# Altium PCB robotcar.PcbDoc (part 2 of 3)
Units mil, origin at the board's own origin, x right, y up, seen from the top; angles counter-clockwise.
Board outline 4050.03 x 1712.03 mil, 2 copper layers (Top Layer, Bottom Layer); 124 components, 123 nets, 485 pads, 136 vias.
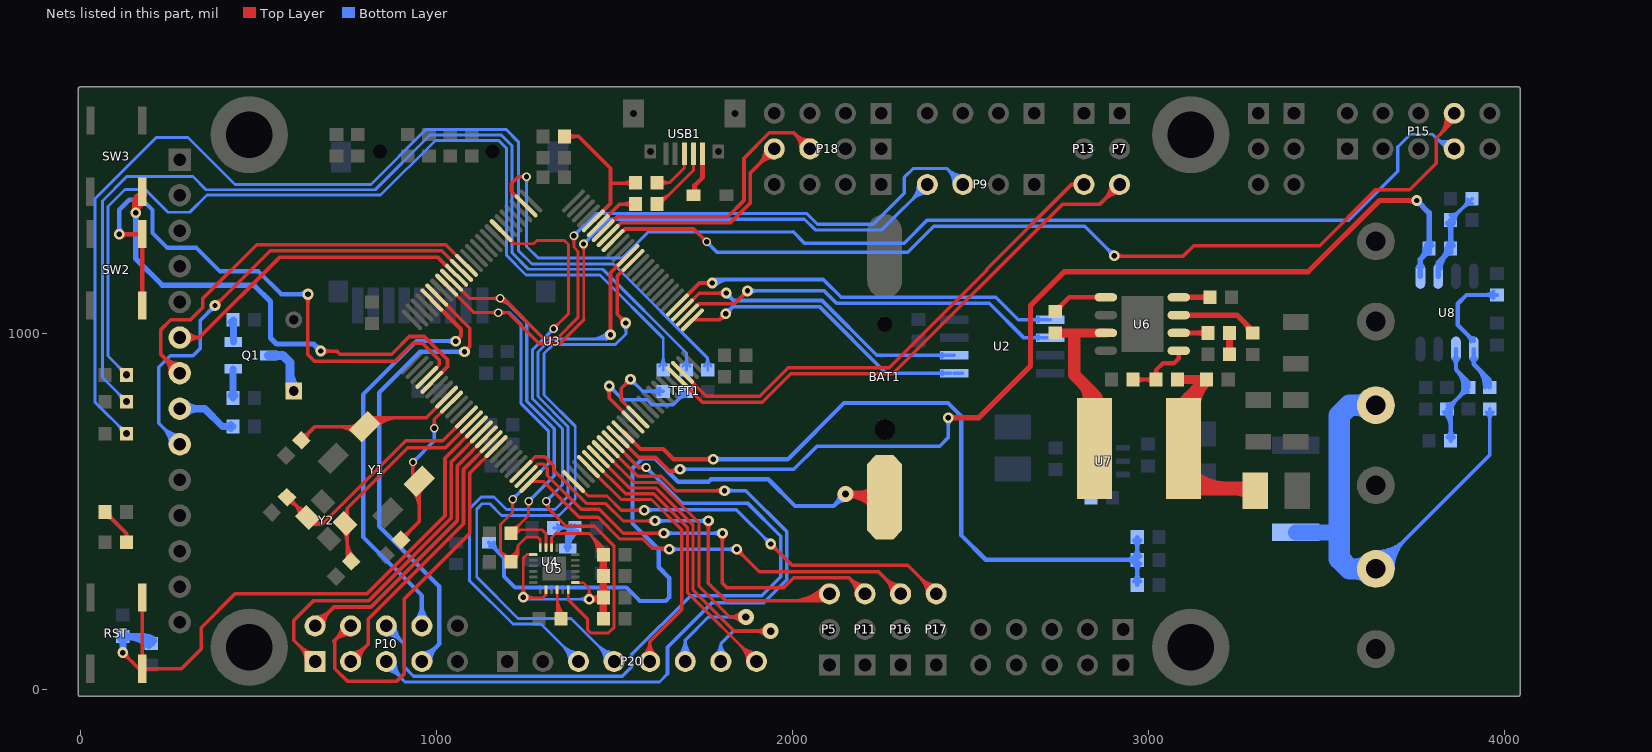
[diagram p2: the nets of this part, all layers, seen from the top]

## Via types
v1: diameter 30, hole 15, Top Layer to Bottom Layer, 73 vias
v2: diameter 23.62, hole 15, Top Layer to Bottom Layer, 11 vias
v3: diameter 35, hole 20, Top Layer to Bottom Layer, 8 vias
v4: diameter 24, hole 15, Top Layer to Bottom Layer, 7 vias
v5: diameter 25, hole 15, Top Layer to Bottom Layer, 7 vias
v6: diameter 30, hole 18, Top Layer to Bottom Layer, 6 vias
v7: diameter 45, hole 20, Top Layer to Bottom Layer, 4 vias
v8: diameter 55, hole 25, Top Layer to Bottom Layer, 4 vias
v9: diameter 43, hole 25, Top Layer to Bottom Layer, 3 vias
v10: diameter 40, hole 20, Top Layer to Bottom Layer, 3 vias
v11: diameter 23, hole 15, Top Layer to Bottom Layer, 3 vias
v12: diameter 32, hole 16, Top Layer to Bottom Layer, 1 vias
v13: diameter 30, hole 20, Top Layer to Bottom Layer, 1 vias
v14: diameter 50, hole 25, Top Layer to Bottom Layer, 1 vias
v15: diameter 27.56, hole 15, Top Layer to Bottom Layer, 1 vias
v16: diameter 25, hole 16, Top Layer to Bottom Layer, 1 vias
v17: diameter 45, hole 30, Top Layer to Bottom Layer, 1 vias
v18: diameter 30, hole 16, Top Layer to Bottom Layer, 1 vias

## Nets (pads, with @x,y where several pads share a name; then routed paths per layer and width w, separated by ;. In a path a pad name is that pad's centre, name@x,y a point inside that pad or via, vN(x,y) a via of type N, cw(c..) or ccw(c..) an arc to the next point about the centre after c; other vN are vias at no path point) (continued)
GND_MOT: P3.1 P4.1 R36.2 R37.1 | length 1993.3
  Bottom Layer w10: P3.1@3640,340 3960,660 R36.2@3960,789.68 ; P3.1@3640,368.15 ccw(c3640,436.11) 3688.05,388.05 ccw(c3736.11,340) P3.1@3668.15,340 ; P3.1@3640,378.15 ccw(c3640,470.25) 3705.13,405.13 ccw(c3770.25,340) P3.1@3678.15,340 ; P3.1@3640,388.15 ccw(c3640,504.39) 3722.2,422.2 ccw(c3804.39,340) P3.1@3688.15,340 ; R36.2@3950.59,780.28 cw(c3927.87,757.56) 3960,757.56 cw(c3992.13,757.56) R36.2@3969.41,780.28
  Bottom Layer w45: R37.1@3415,442.95 3533.95,442.95
  Bottom Layer w60: P3.1@3623.63,323.63 ccw(c3584.11,284.11) 3584.11,340 ccw(c3584.11,395.89) P3.1@3623.63,356.37 ; P4.1@3623.63,783.63 ccw(c3584.11,744.11) 3584.11,800 ccw(c3584.11,855.89) P4.1@3623.63,816.37 ; P3.1@3640,340 3566,340 3537,369 3537,771 3566,800 P4.1@3640,800
KEY_1: SW2.2 U3.4 | length 1864
  Top Layer w10: v12@632.22,1104.22 cw(c613.44,1085.44) 640,1085.44 cw(c666.56,1085.44) v12@647.78,1104.22 ; v12(640,1112) 640,942 658,924 885,924 935,974 961.96,974 1009,926.96 1009,914 U3.4@990,895
  Top Layer w12: v1(110,1280) SW2.2@174.83,1280 ; v1@116.36,1273.64 cw(c131.73,1258.27) 131.73,1280 cw(c131.73,1301.73) v1@116.36,1286.36 ; 159.85,1280 ccw(c159.85,1295.37) SW2.2@170.73,1284.5 ; 161.76,1280 cw(c161.76,1267.32) SW2.2@170.73,1276.29 ; SW2.2@170.73,1111.27 ccw(c160.81,1121.19) 174.83,1121.19 ccw(c188.86,1121.19) SW2.2@178.94,1111.27 ; SW2.2@170.73,1248.73 cw(c160.81,1238.81) 174.83,1238.81 cw(c188.86,1238.81) SW2.2@178.94,1248.73 ; SW2.2@174.83,1079.61 SW2.2@174.83,1280.39
  Bottom Layer w12: v1@103.64,1286.36 ccw(c88.27,1301.73) 110,1301.73 ccw(c131.73,1301.73) v1@116.36,1286.36 ; v1(110,1280) 110,1349 138,1377 174,1377 203,1348 203,1284 245,1242 327,1242 393,1176 501,1176 565,1112 v12(640,1112) ; v12@632.93,1104.93 ccw(c615.86,1087.86) 615.86,1112 ccw(c615.86,1136.14) v12@632.93,1119.07
KEY_2: SW3.2@174.83,1399.61 U3.5 | length 1529
  Top Layer w10: v1(676,952) 721,952 729.5,943.5 875.5,943.5 925,993 967,993 1032,928 1032,908.48 U3.5@987.84,864.32 ; v1@683.07,944.93 cw(c700.14,927.86) 700.14,952 cw(c700.14,976.14) v1@683.07,959.07
  Top Layer w20: v1@156,1335.74 cw(c196.44,1335.74) SW3.2@175.76,1370.49 ; v1(156,1341) 156,1371 SW3.2@174,1389 ; 156,1370.91 cw(c175.51,1370.91) SW3.2@165.53,1387.68 ; SW3.2@173.29,1388.29 cw(c177.36,1384.21) SW3.2@178.54,1389.85
  Bottom Layer w15: v1@150.7,1335.7 cw(c137.89,1322.89) 156,1322.89 cw(c174.11,1322.89) v1@161.3,1335.7 ; v1@152,1345 v1(156,1341) 156,1212 231,1137 489,1137 535,1091 535,989 552,972 656,972 v1(676,952) ; v1@668.5,952 ccw(c650.39,952) 663.2,964.8 ccw(c676,977.61) v1@676,959.5
LED_B: R16.2 U3.39 | length 370.7
  Top Layer w9: v1@1535.5,873 cw(c1510.15,873) 1528.08,855.08 cw(c1546,837.15) v1@1546,862.5 ; v1(1546,873) 1520,847 1520,813.77 U3.39@1566.89,766.89
  Bottom Layer w10: v1@1546,863 cw(c1546,838.86) 1563.07,855.93 cw(c1580.14,873) v1@1556,873 ; v1(1546,873) 1580.32,838.68 R16.2@1638,838.68 ; R16.2@1627.61,829.28 ccw(c1604.89,806.56) 1604.89,838.68 ccw(c1604.89,870.81) R16.2@1627.61,848.09
LED_G: R14.2 U3.38 | length 510
  Top Layer w10: v1@1478.93,846.93 cw(c1461.86,829.86) 1486,829.86 cw(c1510.14,829.86) v1@1493.07,846.93 ; v1(1486,854) 1486,819.99 U3.38@1552.97,752.97 U3.38@1552.97,752.97
  Bottom Layer w10: v1@1486,844 cw(c1486,819.86) 1503.07,836.93 cw(c1520.14,854) v1@1496,854 ; v1(1486,854) 1525,815 1593,815 1607.38,800.62 1664.94,800.62 R14.2@1703,838.68 ; 1678.6,814.29 ccw(c1654.21,838.68) R14.2@1688.71,838.68 ; 1680.98,816.66 cw(c1702.02,795.63) R14.2@1702.02,825.38
MPU_INT: U3.82 U5.12 | length 1825.9
  Top Layer w7: 1371.5,253.5 U5.12@1371.5,281.89
  Top Layer w8: U3.82@1182.71,1290.26 1219.47,1253.5 1273.5,1253.5 1283,1263 1360,1263 1372,1251 1372,1057 v4(1330,1015) ; v4@1330,1023 ccw(c1330,1042.31) 1343.66,1028.66 ccw(c1357.31,1015) v4@1338,1015
  Top Layer w9: v2@1305.91,523.37 cw(c1299.28,509.12) 1315,509.12 ; v2@1315,525 1315,510 1365,460 1445,460 1499.49,405.51 ; 1371.5,253.5 1425,200 1425,170 1435,160 1483.55,160 1500,176.45 1500,405
  Bottom Layer w9: v2(1309,530) 1355,576 1355,733.48 1270.91,817.58 1270.91,955.9 v4(1330,1015) ; v2@1309,537.31 ccw(c1309,554.96) 1321.48,542.48 ccw(c1333.96,530) v2@1316.31,530 ; v4@1322.5,1015 cw(c1304.39,1015) 1317.2,1002.2 cw(c1330,989.39) v4@1330,1007.5
MPU_SCL: P9.3 R15.2 U3.92 U5.23 | length 3290.7
  Top Layer w8: R15.2@1209.97,445 R15.2@1219.97,455 ; R15.2@1210.32,440 1260,489.68 v2(1260,530) ; R15.2@1210.32,455.29 ccw(c1210.32,492.21) 1236.42,466.1 ; R15.2@1224.62,440.98 cw(c1256.79,440.98) 1234.04,463.73 ; R15.2@1225,440 1235,450 1297.86,450 ; v2@1254.48,524.48 cw(c1241.14,511.14) 1260,511.14 cw(c1278.86,511.14) v2@1265.52,524.48 ; 1303.93,443.93 1297.86,450 ; U5.23@1308.5,400 1308.5,439.36 1297.86,450 ; v5@1380.99,1269.99 cw(c1366.48,1255.48) 1387,1255.48 cw(c1407.52,1255.48) v5@1393.01,1269.99 ; v5(1387,1276) 1387,1244 1399,1232 1399,1046.52
  Top Layer w9: U3.92@1043.52,1151.06 1094.58,1100 v4(1180,1100) 1190,1100 1301.5,988.5 1340.98,988.5 1399,1046.52 ; v4@1174.7,1094.7 ccw(c1161.89,1081.89) 1161.89,1100 ccw(c1161.89,1118.11) v4@1174.7,1105.3 ; v4@1180,1092.5 cw(c1180,1050.25) 1209.87,1080.13 ; v4@1180,1101.5 cw(c1180,1080.98) 1194.51,1095.49
  Bottom Layer w9: v4@1180,1092.5 cw(c1180,1055.98) 1205.82,1081.8 ; v4(1180,1100) 1187.63,1100 1254.91,1032.72 1254.91,810.95 1332,733.86 1332,602 v2(1260,530) ; v2@1260,537.31 ccw(c1260,554.96) 1272.48,542.48 ccw(c1284.96,530) v2@1267.31,530 ; v5(1387,1276) 1449.5,1338.5 2041.5,1338.5 2071.5,1308.5 2228.5,1308.5 2315,1395 2315,1440 2340,1465 2435,1465 P9.3@2480,1420 ; v5@1387,1284 ccw(c1387,1303.31) 1400.66,1289.66 ccw(c1414.31,1276) v5@1395,1276 ; P9.3@2454.97,1420 ccw(c2394.55,1420) 2437.28,1462.72 ccw(c2480,1505.45) P9.3@2480,1445.03 ; P9.3@2463.97,1420 ccw(c2425.28,1420) 2452.64,1447.36 ccw(c2480,1474.72) P9.3@2480,1436.03
MPU_SDA: P9.4 R17.2 U3.93 U5.24 | length 3319.5
  Top Layer w8: 1184.21,386.1 ccw(c1210.32,412.21) R17.2@1210.32,375.29 ; 1186.59,383.73 cw(c1163.84,360.98) R17.2@1196.01,360.98 ; R17.2@1206.34,374.73 ccw(c1197.22,406.21) 1230,406.21 ; R17.2@1208.56,367.04 ccw(c1200.3,395.57) 1230,395.57 ; v2@1209.48,530.48 cw(c1196.14,517.14) 1215,517.14 cw(c1233.86,517.14) v2@1220.52,530.48 ; R17.2@1210.79,359.36 ccw(c1203.39,384.92) 1230,384.92 ; R17.2@1213.5,374.93 ccw(c1217.45,392.23) 1230,379.68 ; v2(1215,536) 1215,499 1181.01,465.01 1181.01,389.31 R17.2@1210.32,360 1230,379.68 ; R17.2@1224.47,363.04 cw(c1243.83,365.85) 1230,379.68 ; U5.24@1292.76,400 1292.76,422.24 1285,430 1253.79,430 1230,406.21 ; v5@1407.99,1246.99 cw(c1391.07,1230.06) 1415,1230.06 ; 1415,1039.9 v5@1415,1253 ; 1415,1234.89 cw(c1432.11,1234.89) v5@1420.01,1246.99 ; 1230,379.68 1230,406.21
  Top Layer w9: U3.93@1032.82,1137.14 U3.93@1029.6,1137.14 1106.74,1060 v4(1175,1060) 1202.5,1060 1290,972.5 1347.6,972.5 1415,1039.9 ; v4@1169.7,1054.7 ccw(c1156.89,1041.89) 1156.89,1060 ccw(c1156.89,1078.11) v4@1169.7,1065.3 ; v4@1180.3,1054.7 cw(c1193.11,1041.89) 1193.11,1060 cw(c1193.11,1078.11) v4@1180.3,1065.3
  Bottom Layer w9: v4(1175,1060) 1205,1060 1238.91,1026.1 1238.91,804.32 1316,727.23 1316,637 v2(1215,536) ; v4@1180.3,1054.7 cw(c1193.11,1041.89) 1193.11,1060 cw(c1193.11,1078.11) v4@1180.3,1065.3 ; v2@1215,543.31 ccw(c1215,560.96) 1227.48,548.48 ccw(c1239.96,536) v2@1222.31,536 ; v5@1414,1261 ccw(c1414,1282.73) 1429.36,1267.36 ; v5@1415,1253 1484.5,1322.5 2034.87,1322.5 2064.87,1292.5 2252.5,1292.5 P9.4@2380,1420 ; v5@1422,1253 cw(c1438.9,1253) 1426.95,1264.95 ; P9.4@2354.97,1420 cw(c2294.55,1420) 2337.28,1377.28 cw(c2380,1334.55) P9.4@2380,1394.97 ; P9.4@2363.97,1420 cw(c2325.28,1420) 2352.64,1392.64 cw(c2380,1365.28) P9.4@2380,1403.97
  other v5: 1414,1253
NetBAT1_1: BAT1.1 D6.1 | length 2108
  Top Layer w20: v7@2158.84,541.16 cw(c2180.18,519.82) 2180.18,550 cw(c2180.18,580.18) v7@2158.84,558.84 ; 2186.21,550 ccw(c2186.21,615.15) BAT1.1@2232.27,569.08 ; 2195.97,550 cw(c2195.97,481.71) BAT1.1@2245.94,528.26 ; BAT1.1@2211.35,550 v7(2150,550) cw(c2150.01,438.88) BAT1.1@2231.31,514.63
  Bottom Layer w12: D6.1@1148.46,414 1191,371.46 1191,319 1222,288 1534.47,288 1572.47,250 1645.2,250 1654.7,259.5 1654.7,315.3 1625.5,344.5 1625.5,394.5 1552,468 1552,623.06 1579.44,650.5 1614.5,650.5 1680,585 1765,585 1772,592 1933,592 2008,517 2117,517 v7(2150,550) ; D6.1@1151.8,403.66 cw(c1151.8,386.78) D6.1@1163.74,398.72 ; D6.1@1162.14,414 ccw(c1195.18,414) 1171.82,390.64 ; v7@2133.5,550 cw(c2093.67,550) 2121.83,521.83 cw(c2150,493.67) v7@2150,533.5
NetBEEP1_1: BEEP1.1 Q1.3 | length 202.8
  Bottom Layer w25: Q1.3@529.21,940 569.21,940 589.21,920 589.21,850.79 BEEP1.1@600,840 ; 589.21,892.89 ccw(c652.89,892.89) BEEP1.1@607.86,847.86
NetC2_2: C2.2 U3.8 Y1.2 | length 807.3
  Top Layer w10: C2.2@621.44,701.44 660,740 Y1.2@800,740 ; C2.2@621.44,714.74 ccw(c621.44,746.87) 644.15,724.15 ccw(c666.87,701.44) C2.2@634.74,701.44 ; 721.78,740 cw(c721.78,661.78) Y1.2@777.09,717.09 ; 745.92,740 cw(c745.92,685.92) Y1.2@784.16,724.16 ; 762.1,740 ccw(c762.1,761.2) Y1.2@777.09,746.21 ; Y1.2@808.77,747.93 cw(c849.97,706.73) 849.97,765 ; Y1.2@810,755 820,765 972.03,765 U3.8@1029.6,822.56 ; Y1.2@815.84,740.86 cw(c874.11,682.59) 874.11,765 ; Y1.2@822.91,733.79 cw(c898.25,658.45) 898.25,765
NetC3_2: C3.2 U3.9 Y1.1 | length 746
  Top Layer w10: C3.2@901.44,421.44 953.11,473.11 Y1.1@953.11,586.89 935,605 ; C3.2@901.44,434.74 ccw(c901.44,466.87) 924.15,444.15 ccw(c946.87,421.44) C3.2@914.74,421.44 ; Y1.1@930.2,563.97 cw(c874.89,508.66) 953.11,508.66 ; v11@930.4,635.4 cw(c919.31,624.31) 935,624.31 cw(c950.69,624.31) v11@939.6,635.4 ; v11(935,640) 935,605 ; Y1.1@935.76,597.98 ccw(c931.01,601.01) 935,605 ; Y1.1@937.27,571.05 cw(c899.03,532.8) 953.11,532.8 ; Y1.1@942.02,604.24 cw(c938.99,608.99) 935,605 ; 953.11,548.99 cw(c974.31,548.99) Y1.1@959.32,563.97 ; v11@990.4,739.6 ccw(c979.31,750.69) 995,750.69 ccw(c1010.69,750.69) v11@999.6,739.6 ; v11(995,735) 995,760.13 U3.9@1043.52,808.64
  Bottom Layer w10: v11(935,640) 995,700 v11(995,735) ; v11@935,646.5 ccw(c935,662.19) 946.1,651.1 ccw(c957.19,640) v11@941.5,640 ; v11@990.4,730.4 cw(c979.31,719.31) 995,719.31 cw(c1010.69,719.31) v11@999.6,730.4
NetC4_2: C4.2 U3.12 Y2.3 | length 858.4
  Top Layer w10: C4.2@582.13,527.43 cw(c582.13,490.17) 608.48,516.52 ; C4.2@582.5,542.5 659.6,465.4 680.1,465.4 ; C4.2@595.44,540.74 ccw(c622.43,540.74) 603.34,521.66 ; 603.09,521.91 cw(c569.39,488.2) Y2.3@617.06,488.2 ; 608.18,516.82 ccw(c634.69,543.33) Y2.3@634.69,505.84 ; Y2.3@649.22,482.29 ccw(c668.61,484.98) 668.61,465.4 ; Y2.3@650.21,465.81 cw(c654.46,458.15) 660.65,464.35 cw(c668,471.69) Y2.3@658.23,475.23 ; Y2.3@659.12,483.66 ccw(c680.1,486.57) 680.1,465.4 ; U3.12@1085.27,766.89 1018.39,700 914.7,700 680.1,465.4
NetC5_2: C5.2 U3.13 Y2.1 | length 831.4
  Top Layer w10: Y2.1@734.56,488.11 ccw(c726.76,510) 750,510 ; Y2.1@734.97,452.06 cw(c698.68,415.78) 750,415.78 ; Y2.1@737.92,478.69 ccw(c731.82,495.82) 750,495.82 ; Y2.1@742.04,459.14 cw(c722.82,439.92) Y2.1@750,439.92 ; 750,396.04 ccw(c794.65,396.04) C5.2@763.08,364.47 ; 750,420.19 ccw(c818.79,420.19) C5.2@770.15,371.54 ; 750,428.13 cw(c783.84,428.13) Y2.1@759.91,452.06 ; C5.2@761.44,361.44 750,372.87 750,510 ; U3.13@1099.19,752.97 1026.23,680 920,680 750,510
NetC6_2: C6.2 R11.2 U4.1 | length 358.6
  Bottom Layer w8: C6.2@1330.32,455 R11.2@1384.68,455 ; C6.2@1340.43,444.88 cw(c1364.86,420.46) 1364.86,455 cw(c1364.86,489.54) C6.2@1340.43,465.12 ; R11.2@1379.57,444.88 ccw(c1355.14,420.46) 1355.14,455 ccw(c1355.14,489.54) R11.2@1379.57,465.12
  Bottom Layer w15: U4.1@1364.77,401.84 ccw(c1354.05,412.56) 1369.21,412.56 ccw(c1384.37,412.56) U4.1@1373.65,401.84 ; U4.1@1369.21,393.82 cw(c1431.98,393.82) R11.2@1395.9,445.17 ; U4.1@1369.21,397.4 1369.21,439.53 1384.68,455 R11.2@1389.68,460 ; 1369.21,422.68 cw(c1411.69,422.68) R11.2@1387.27,457.45
NetC15_2: C15.2 C16.2 C17.2 R20.1 U5.1 U5.8 U5.13 U5.22 | length 1535.4
  Top Layer w7: U5.13@1391.18,301.57 1413.43,301.57 1430,285 v1(1430,255) ; v1@1421.87,263.13 ccw(c1402.24,282.76) 1430,282.76 ccw(c1457.76,282.76) v1@1438.13,263.13
  Top Layer w8: v1@1237.22,267.78 ccw(c1218.44,286.56) 1245,286.56 ccw(c1271.56,286.56) 1252.78,267.78 ccw(c1273.78,288.78) 1273.78,259.08 ; v1@1252.78,252.22 cw(c1269.33,235.67) 1269.33,259.08 ; U5.1@1273.07,380.31 1255.32,380.31 1245,370 v1(1245,260) 1245.92,259.08 1300.1,259.08 1308.5,267.49 U5.8@1308.5,281.89 ; 1303.99,262.98 ccw(c1292.96,274.02) U5.8@1308.57,274.02 ; U5.22@1324.25,400 1324.25,428.73 1335.52,440 1430,440 1469.68,400.31 ; 1431.59,438.41 cw(c1374.17,380.98) C15.2@1455.38,380.98 ; 1445.25,424.75 cw(c1401.48,380.98) C15.2@1463.38,380.98 ; 1458.91,411.09 cw(c1428.8,380.98) C15.2@1471.38,380.98 ; C15.2@1465.51,394.67 ccw(c1463.78,400.31) 1469.68,400.31 ; C15.2@1469.68,380 1469.68,400.31 ; C15.2@1473.86,394.67 cw(c1475.59,400.31) 1469.68,400.31
  Top Layer w20: v1(1430,255) 1464.68,255 C17.2@1469.68,260 ; v1@1439.93,255 ccw(c1439.93,288.77) C17.2@1463.81,264.89 ; R20.1@1463.81,206.86 ccw(c1449.63,221.04) 1469.68,221.04 ccw(c1489.74,221.04) R20.1@1475.56,206.86 ; C17.2@1463.81,253.14 cw(c1449.63,238.96) 1469.68,238.96 cw(c1489.74,238.96) C17.2@1475.56,253.14 ; C17.2@1463.81,266.86 ccw(c1449.63,281.04) 1469.68,281.04 ccw(c1489.74,281.04) C17.2@1475.56,266.86 ; C16.2@1463.81,313.14 cw(c1449.63,298.96) 1469.68,298.96 cw(c1489.74,298.96) C16.2@1475.56,313.14 ; C16.2@1463.81,326.86 ccw(c1449.63,341.04) 1469.68,341.04 ccw(c1489.74,341.04) C16.2@1475.56,326.86 ; C15.2@1463.81,373.14 cw(c1449.63,358.96) 1469.68,358.96 cw(c1489.74,358.96) C15.2@1475.56,373.14 ; R20.1@1469.69,200 C17.2@1469.68,260 ; C15.2@1469.68,380 C16.2@1469.68,320 C17.2@1469.68,260
  Bottom Layer w8: v1@1247.12,262.12 ccw(c1264.31,279.31) 1264.31,255 ; v1@1250,255 v1(1430,255) ; v1@1252.78,252.22 cw(c1259.49,245.51) 1259.49,255 ; v1@1252.78,267.78 ccw(c1283.63,298.63) 1283.63,255 ; v1@1422.22,247.22 ccw(c1403.44,228.44) 1403.44,255 ccw(c1403.44,281.56) v1@1422.22,262.78
NetC18_2: C18.2 U5.10 | length 199
  Top Layer w7: C18.2@1340,210.31 U5.10@1340,281.89 ; 1340,227.84 ccw(c1377.17,227.84) C18.2@1350.89,201.55 ; 1340,244.73 ccw(c1394.07,244.73) C18.2@1355.84,206.5 ; 1340,261.63 ccw(c1410.97,261.63) C18.2@1360.79,211.45
NetC20_1: C20.1 U6.1 | length 227.8
  Top Layer w12: C20.1@2739,1063.31 2778.68,1103 U6.1@2881.64,1103 ; C20.1@2739.98,1075.62 ccw(c2739.98,1102.96) 2759.31,1083.63 ; C20.1@2752.29,1063.31 cw(c2784.38,1063.31) 2761.69,1086 ; U6.1@2857.84,1098.89 ccw(c2847.92,1088.97) 2847.92,1103 ccw(c2847.92,1117.03) U6.1@2857.84,1107.11
NetC20_2: C20.2 L1.1 U6.3 | length 731.1
  Top Layer w25: C20.2@2739,1003 2792,1003 U6.3@2881.64,1003
  Top Layer w35: 2793,991 2793,885 2847,831 ; 2817.76,860.24 cw(c2778.96,821.43) L1.1@2823.35,789.17 ; 2818.6,859.4 cw(c2736.75,777.54) L1.1@2852.28,770.31 ; L1.1@2829.62,795.62 ccw(c2802.31,831) 2847,831 ; 2846.73,831.27 cw(c2812.51,797.04) L1.1@2851.66,768.59 ; L1.1@2847,750 2847,831 ; L1.1@2865.68,797.49 cw(c2886.39,831) 2847,831
NetC21_2: C21.2 U6.8 | length 128.3
  Top Layer w15: U6.8@3086.36,1103 C21.2@3173.68,1103 ; C21.2@3166.04,1095.36 ccw(c3147.59,1076.91) 3147.59,1103 ccw(c3147.59,1129.09) C21.2@3166.04,1110.64
NetC22_1: C22.1 U6.6 | length 123.3
  Top Layer w15: U6.6@3086.36,1003 C22.1@3168.68,1003 ; C22.1@3161.04,995.36 ccw(c3142.59,976.91) 3142.59,1003 ccw(c3142.59,1029.09) C22.1@3161.04,1010.64
NetC22_2: C22.2 R29.1 | length 123.1
  Top Layer w20: R29.1@3223.13,949.86 ccw(c3208.18,964.8) 3229.32,964.8 ; C22.2@3223.44,996.14 cw(c3209.26,981.96) 3229.31,981.96 cw(c3249.37,981.96) C22.2@3235.19,996.14 ; R29.1@3229,943 3229.32,943.31 C22.2@3229.32,1003 ; 3229.31,963.28 ccw(c3248.29,963.28) R29.1@3234.87,949.86
NetC23_1: C23.1 L1.2 R28.1 R30.2 | length 817.6
  Top Layer w25: R30.2@3083.32,872 R28.1@3164.69,872
  Top Layer w30: C23.1@3294.94,566 C23.1@3300.94,560
  Top Layer w35: L1.2@3095.73,770.15 cw(c3156.95,777.13) 3113.38,820.7 ; L1.2@3099,678 3099,806.31 R28.1@3164.69,872 ccw(c3249.04,787.64) L1.2@3130.51,774.11
  Top Layer w40: L1.2@3104,566 C23.1@3294.94,566 ; L1.2@3119.66,606.14 ccw(c3216.56,703.04) 3216.56,566 ; 3249.2,566 cw(c3249.2,508.26) C23.1@3290.03,549.09
NetC26_2: C26.2 R32.1 R33.1 U8.2 | length 519.4
  Bottom Layer w10: R33.1@3849.69,1320 3909.69,1380 C26.2@3910.32,1380 ; R33.1@3849.69,1334.29 ccw(c3849.69,1368.79) 3874.08,1344.4 ; R33.1@3862.99,1320.98 cw(c3892.74,1320.98) 3871.71,1342.02 ; 3884.84,1355.16 cw(c3910.32,1329.69) C26.2@3910.32,1365.71 ; 3888.74,1359.05 ccw(c3868.78,1379.02) C26.2@3897.01,1379.02
  Bottom Layer w15: U8.2@3815,1162.36 3815,1200 R32.1@3850.31,1235.31 ; U8.2@3821.28,1184.02 cw(c3875.03,1184.02) R32.1@3837.02,1222.02 ; 3829.25,1214.25 ccw(c3804.48,1239.02) R32.1@3839.51,1239.02 ; R32.1@3838.18,1223.18 cw(c3850.31,1211.05) R32.1@3850.31,1228.21 ; R33.1@3842.04,1311.37 cw(c3822.07,1291.4) 3850.31,1291.4 ; R32.1@3842.67,1248.63 ccw(c3824.22,1267.07) 3850.31,1267.07 ccw(c3876.41,1267.07) R32.1@3857.96,1248.63 ; R33.1@3849.69,1320 3850.31,1319.37 R32.1@3850.31,1240 ; 3850.31,1294.45 cw(c3874.26,1294.45) R33.1@3857.33,1311.37
NetC27_1: C27.1 R34.2 R35.2 U8.6 | length 627.4
  Bottom Layer w12: R34.2@3832.28,780.98 cw(c3788.75,737.45) 3850.31,737.45 ; R34.2@3840.77,789.47 cw(c3817.72,766.42) 3850.32,766.42 ; R34.2@3840.98,801.99 ccw(c3840.98,829.33) 3860.31,810 ; C27.1@3841.61,709.69 ccw(c3820.6,730.7) 3850.31,730.7 ccw(c3880.03,730.7) C27.1@3859.02,709.69 ; C27.1@3850.32,700 3850.32,779.37 R34.2@3840,789.68 R35.2@3900,849.68 ; R34.2@3853.29,789.68 cw(c3885.38,789.68) 3862.69,812.37 ; U8.6@3859.5,930.48 cw(c3846.22,917.2) 3865,917.2 cw(c3883.78,917.2) U8.6@3870.5,930.48 ; U8.6@3865,957.64 3865,900 3900,865 R35.2@3900,850.32 ; 3866.93,898.07 cw(c3819.17,850.32) 3886.71,850.32 cw(c3853.1,850.32) 3876.86,826.55 ; 3880.76,830.45 cw(c3899.02,812.19) R35.2@3899.02,838.01 ; 3887.41,877.59 cw(c3860.14,850.32) R35.2@3898.71,850.32
NetC32_2: C32.2 U7.4 | length 87.4
  Bottom Layer w10: U7.4@2820,605.2 2820,573 C32.2@2841,552 ; 2828.37,564.63 cw(c2808.49,544.75) C32.2@2836.4,541.38
NetC34_2: C34.2 R36.1 U8.5 | length 577.8
  Bottom Layer w12: 3901.22,993.78 cw(c3886.73,979.29) U8.5@3907.22,979.29 ; 3902.93,992.07 ccw(c3915,1004.14) U8.5@3915,987.07 ; U8.5@3909.5,930.48 cw(c3896.22,917.2) 3915,917.2 cw(c3933.78,917.2) U8.5@3920.5,930.48 ; U8.5@3915,957.64 3915,915 3960,870 R36.1@3960,850.31 ; U8.5@3915,980 3870,1025 3870,1085 3894.68,1109.69 C34.2@3980,1109.69 ; 3923.39,906.61 cw(c3867.1,850.31) R36.1@3946.71,850.31 ; 3943.88,886.12 cw(c3908.07,850.31) R36.1@3958.71,850.31 ; C34.2@3970.31,1100.98 ccw(c3949.3,1079.97) 3949.3,1109.69 ccw(c3949.3,1139.4) C34.2@3970.31,1118.39
NetD1_A: D1.A R12.1 | length 184.3
  Top Layer w10: R12.1@69.69,485.71 cw(c69.69,451.21) 94.08,475.6 ; R12.1@69.69,500 130.32,439.37 ; R12.1@82.99,499.02 ccw(c112.74,499.02) 91.71,477.98 ; D1.A@123.52,427.42 ccw(c116.42,439.37) 130.32,439.37 ; D1.A@130.32,420 130.32,439.37 ; D1.A@137.11,427.42 cw(c144.21,439.37) 130.32,439.37
NetD2_A: D2.A R13.1 | length 3185.6
  Bottom Layer w8: v3@116.82,720 ccw(c84.22,720) 107.27,743.05 ccw(c130.32,766.09) v3@130.32,733.5 ; v3(130.32,720) 42,808.32 42,1380 214,1552 303,1552 435,1420 817,1420 971,1574 1197,1574 1231,1540 1231,1235 1269,1197 1498,1197 1763,932 ; R13.1@1753.29,909.83 ccw(c1732.82,932) 1763,932 ; R13.1@1763,899.31 1763,932 ; R13.1@1772.71,909.83 cw(c1793.18,932) 1763,932
NetD3_A: D3.A R14.1 | length 2922.1
  Bottom Layer w8: v3@116.82,810 ccw(c84.22,810) 107.27,833.05 ccw(c130.32,856.09) v3@130.32,823.5 ; v3(130.32,810) 63,877.32 63,1374 131,1442 317,1442 354,1405 829,1405 983,1559 1183,1559 1213,1529 1213,1228 1259,1182 1468,1182 1703,947 R14.1@1703,899.31 ; R14.1@1692.88,909.43 ccw(c1668.46,933.86) 1703,933.86 ccw(c1737.54,933.86) R14.1@1713.12,909.43
NetD5_A: D5.A R16.1 | length 2785.3
  Bottom Layer w8: v3@117.16,885.34 ccw(c84.57,885.34) 107.61,908.39 ccw(c130.66,931.43) v3@130.66,898.84 ; v3(130.66,885.34) 78,938 78,1358 126,1406 183,1406 247,1342 308,1342 356,1390 844,1390 998,1544 1176,1544 1198,1522 1198,1221 1253,1166 1460,1166 1638,988 R16.1@1638,899.31 ; R16.1@1627.88,909.43 ccw(c1603.46,933.86) 1638,933.86 ccw(c1672.54,933.86) R16.1@1648.12,909.43
NetD7_1: D7.1 USB1.1 | length 163.5
  Top Layer w13: D7.1@1719.93,1396.96 ccw(c1705.29,1411.6) 1726,1411.6 ; D7.1@1723.54,1390 1726,1392.46 1726,1417 1748.46,1439.46 USB1.1@1748.46,1505.83 ; 1726,1415.9 ccw(c1752.79,1415.9) D7.1@1733.85,1396.96
NetQ1_1: Q1.1 R25.2 | length 113
  Bottom Layer w20: R25.2@423.81,826.86 ccw(c409.63,841.04) 429.68,841.04 ccw(c449.74,841.04) R25.2@435.56,826.86 ; R25.2@429.68,820 Q1.1@429.68,901.5
NetQ1_2: Q1.2 R22.1 | length 80.2
  Bottom Layer w20: R22.1@423.81,1033.14 cw(c406.97,1016.3) 430.79,1016.3 ; Q1.2@430.79,977.4 R22.1@430.79,1038.9
NetR1_1: R1.1 USB1.2 | length 276.6
  Top Layer w8: R1.1@1620.31,1372.29 ccw(c1620.31,1408.45) 1645.88,1382.88 ; R1.1@1620.31,1380.29 ccw(c1620.31,1435.76) 1659.54,1396.54 ; R1.1@1626,1363 1722.87,1459.87 USB1.2@1722.87,1505.83 ; R1.1@1634.62,1365.98 cw(c1648.23,1365.98) R1.1@1638.61,1375.61 ; USB1.2@1720.83,1479.18 cw(c1715.9,1474.24) 1722.87,1474.24 cw(c1729.85,1474.24) USB1.2@1724.92,1479.18
NetR2_1: R2.1 USB1.3 | length 205.4
  Top Layer w8: R2.1@1618.31,1414 1629.31,1425 1656,1425 1697.28,1466.28 USB1.3@1697.28,1505.83 ; R2.1@1630.43,1414.88 cw(c1654.86,1390.46) 1654.86,1425 cw(c1654.86,1459.54) R2.1@1630.43,1435.12 ; USB1.3@1695.24,1479.18 cw(c1690.31,1474.24) 1697.28,1474.24 cw(c1704.26,1474.24) USB1.3@1699.33,1479.18
NetR10_2: R10.2 TFT1.8 | length 283.4
  Bottom Layer w20: TFT1.8@280,790 350,790 400,740 R10.2@429.68,740 ; TFT1.8@295.2,774.8 cw(c331.9,738.1) 331.9,790 cw(c331.9,841.9) TFT1.8@295.2,805.2 ; R10.2@423.81,734.13 ccw(c409.63,719.94) 409.63,740 ccw(c409.63,760.06) R10.2@423.81,745.87
NetR27_1: R27.1 U6.7 | length 267.5
  Top Layer w15: U6.7@3086.36,1053 3250,1053 R27.1@3300,1003 ; 3269.85,1033.15 cw(c3240.02,1003.31) R27.1@3282.21,1003.31
NetR30_1: R30.1 R31.2 U6.5 | length 342.2
  Top Layer w12: R31.2@2958.32,872 R30.1@3022.69,872 3022.69,898.69 ; R31.2@2967.02,863.3 cw(c2988.03,842.29) 2988.03,872 cw(c2988.03,901.71) R31.2@2967.02,880.7 ; R30.1@3013.98,863.3 ccw(c2992.97,842.29) 2992.97,872 ccw(c2992.97,901.71) R30.1@3013.98,880.7 ; R30.1@3014.97,882.57 ccw(c3002.01,898.68) 3022.69,898.68 ; R30.1@3030.4,882.57 cw(c3043.36,898.68) 3022.69,898.68 ; U6.5@3082.25,948.89 cw(c3072.33,938.97) 3086.36,938.97 cw(c3100.39,938.97) U6.5@3090.47,948.89 ; U6.5@3086.36,953 3086.36,931.36 3073,918 3042,918 3022.69,898.69
NRST: C19.2 R21.1 RST.2 U3.14 | length 2038.7
  Top Layer w10: v1@120,95 cw(c120,70.86) 137.07,87.93 cw(c154.14,105) v1@130,105 ; v1(120,105) 165.39,59.61 284.61,59.61 340,115 340,175 435,270 805.96,270 1025,489.04 1025,650.93 U3.14@1113.11,739.05 ; RST.2@170.02,91.98 ccw(c157.99,104.01) 175,104.01 ; RST.2@170.02,228.02 cw(c157.99,215.99) 175,215.99 ; RST.2@174,59.61 175,60.61 RST.2@175,266 ; 175,103.21 ccw(c190.88,103.21) RST.2@179.65,91.98 ; 175,216.79 cw(c190.88,216.79) RST.2@179.65,228.02 ; RST.2@179.65,54.79 cw(c191.28,43.16) 191.28,59.61 cw(c191.28,76.05) RST.2@179.65,64.42
  Bottom Layer w20: R21.1@114.13,143.81 cw(c99.94,129.63) 120,129.63 cw(c140.06,129.63) R21.1@125.87,143.81 ; v1(120,105) R21.1@120,149.69 180.63,149.69 C19.2@200,130.31 ; R21.1@126.86,143.81 cw(c141.04,129.63) 141.04,149.69 cw(c141.04,169.74) R21.1@126.86,155.56 ; R21.1@132.2,149.69 cw(c132.2,63.5) C19.2@193.14,124.44 ; 180.48,149.69 cw(c180.48,111.78) C19.2@207.28,138.58
PA0: P5.3 U3.23 | length 1610.8
  Top Layer w9: U3.23@1238.39,613.77 1238.39,615.02 1278.37,655 1305,655 1330,630 1330,617.25 1423.75,523.5 1476.5,523.5 1525,475 v1(1615,475) ; v1@1607.58,467.58 ccw(c1589.65,449.65) 1589.65,475 ccw(c1589.65,500.35) v1@1607.58,482.42
  Top Layer w10: v1@1757.93,467.93 cw(c1740.86,450.86) 1765,450.86 cw(c1789.14,450.86) v1@1772.07,467.93 ; v1(1765,475) 1765,300 1815,250 2085,250 P5.3@2105,270 ; 1997.5,250 ccw(c1997.5,377.5) P5.3@2087.66,287.34 ; 2021.64,250 ccw(c2021.64,353.36) P5.3@2094.73,280.27 ; 2045.79,250 ccw(c2045.79,329.21) P5.3@2101.8,273.2 ; 2069.93,250 ccw(c2069.93,305.07) P5.3@2108.87,266.13
  Bottom Layer w10: v1(1615,475) v1(1765,475) ; v1@1622.07,467.93 cw(c1639.14,450.86) 1639.14,475 cw(c1639.14,499.14) v1@1622.07,482.07 ; v1@1757.93,467.93 ccw(c1740.86,450.86) 1740.86,475 ccw(c1740.86,499.14) v1@1757.93,482.07
PA1: P11.3 U3.24 | length 1545.5
  Top Layer w9: U3.24@1252.31,599.85 1287.45,635 1300.45,635 1312.5,622.95 1312.5,602.5 1407.5,507.5 1458.82,507.5 1526.32,440 v1(1640,440) ; v1@1632.58,432.58 ccw(c1614.65,414.65) 1614.65,440 ccw(c1614.65,465.35) v1@1632.58,447.42
  Top Layer w10: v1@1797.29,433.57 cw(c1780.22,416.5) 1804.36,416.5 cw(c1828.5,416.5) v1@1811.43,433.57 ; v1(1804.36,440.64) 1804.36,299.68 1817.04,287 1977,287 2005,315 2160,315 P11.3@2205,270 ; P11.3@2180.47,270 ccw(c2121.26,270) 2163.13,311.87 ccw(c2205,353.74) P11.3@2205,294.53 ; P11.3@2190.47,270 ccw(c2155.4,270) 2180.2,294.8 ccw(c2205,319.6) P11.3@2205,284.53
  Bottom Layer w10: v1@1640.64,440.64 v1(1804.36,440.64) v1@1810,446.29 ; v1@1647.07,432.93 cw(c1665.69,414.31) 1665.69,440.64 ; v1@1647.07,447.07 ccw(c1662.59,462.59) 1662.59,440.64 ; v1@1797.29,433.57 ccw(c1780.22,416.5) 1780.22,440.64 ccw(c1780.22,464.78) v1@1797.29,447.71
PA2: P16.3 U3.25 | length 1469.4
  Top Layer w9: U3.25@1266.23,585.93 1301.44,585.93 1402.37,485 1455,485 1516,424 1581,424 1606.54,398.46 1608.46,398.46
  Top Layer w10: 1608.46,398.46 1651.54,398.46 v1(1655,395) ; 1622.51,398.46 cw(c1622.51,362.51) v1@1647.93,387.93 ; 1639.21,398.46 ccw(c1639.21,410.79) v1@1647.93,402.07 ; v1@1845,385 cw(c1845,360.86) 1862.07,377.93 cw(c1879.14,395) v1@1855,395 ; v1(1845,395) 1908,332 2243,332 P16.3@2305,270 ; P16.3@2280.47,270 ccw(c2221.26,270) 2263.13,311.87 ccw(c2305,353.74) P16.3@2305,294.53 ; P16.3@2290.47,270 ccw(c2255.4,270) 2280.2,294.8 ccw(c2305,319.6) P16.3@2305,284.53
  Bottom Layer w10: v1(1655,395) v1(1845,395) ; v1@1662.07,387.93 cw(c1679.14,370.86) 1679.14,395 cw(c1679.14,419.14) v1@1662.07,402.07 ; v1@1837.93,387.93 ccw(c1820.86,370.86) 1820.86,395 ccw(c1820.86,419.14) v1@1837.93,402.07
PA3: P17.3 U3.26 | length 1458.3
  Top Layer w9: U3.26@1385.93,585.93 1426.87,545 ; 1428.06,546.19 1426.87,545 ; v1@1577.58,497.58 ccw(c1559.65,479.65) 1559.65,505 ccw(c1559.65,530.35) v1@1577.58,512.42 ; v1(1585,505) 1520,505 1480,545 1426.87,545
  Top Layer w10: v1@1940,400 cw(c1940,375.86) 1957.07,392.93 cw(c1974.14,410) v1@1950,410 ; v1(1940,410) 2000,350 2325,350 P17.3@2405,270 ; P17.3@2380.47,270 ccw(c2321.26,270) 2363.13,311.87 ccw(c2405,353.74) P17.3@2405,294.53 ; P17.3@2390.47,270 ccw(c2355.4,270) 2380.2,294.8 ccw(c2405,319.6) P17.3@2405,284.53
  Bottom Layer w9: v1(1585,505) 1586.5,506.5 1843.5,506.5 v1(1940,410) ; v1@1592.42,497.58 cw(c1613.97,476.03) 1613.97,506.5 ; v1@1592.42,512.42 ccw(c1606.73,526.73) 1606.73,506.5 ; v1@1929.5,410 ccw(c1904.15,410) 1922.08,427.92 ccw(c1940,445.85) v1@1940,420.5
PA4: P20.5 U3.29 | length 845.7
  Top Layer w9: U3.29@1450,605 1520,535 1605,535 1690,450 1690,225 1600,135 ; P20.5@1583.56,98.87 ccw(c1552.09,135) 1600,135 ; P20.5@1589.47,92.08 ccw(c1569.32,115.22) 1600,115.22 ccw(c1630.68,115.22) P20.5@1610.53,92.08 ; P20.5@1600,80 1600,135 ; P20.5@1616.44,98.87 cw(c1647.91,135) 1600,135
PA5: P20.8 U3.30 | length 953.7
  Top Layer w9: U3.30@1441.61,641.61 1532.22,551 1611.63,551 1706,456.63 1706,410.97 1706,319.66 1706,274 P20.8@1900,80 ; P20.8@1874.97,80 ccw(c1814.55,80) 1857.28,122.72 ccw(c1900,165.45) P20.8@1900,105.03 ; P20.8@1883.97,80 ccw(c1845.28,80) 1872.64,107.36 ccw(c1900,134.72) P20.8@1900,96.03
PA6: P20.7 U3.31 | length 1249.6
  Top Layer w9: U3.31@1455.53,655.53 1544.06,567 1618.25,567 1722,463.25 1722,280.63 1837.63,165 v7(1940,165) ; v7@1927.27,152.27 ccw(c1896.54,121.54) 1896.54,165 ccw(c1896.54,208.46) v7@1927.27,177.73
  Bottom Layer w9: P20.7@1785,100.04 ccw(c1762.57,130) 1800,130 ; P20.7@1790.4,92.83 ccw(c1776.03,112.02) 1800,112.02 ccw(c1823.97,112.02) P20.7@1809.6,92.83 ; P20.7@1800,80 1800,130 ; P20.7@1815,100.04 cw(c1837.43,130) 1800,130 ; v7@1927.27,152.27 ccw(c1896.54,121.54) 1896.54,165 ccw(c1896.54,208.46) v7@1927.27,177.73 ; v7(1940,165) 1835,165 1800,130
PA7: P20.6 U3.32 | length 1244.6
  Top Layer w9: U3.32@1469.45,669.45 1555.9,583 1624.88,583 1738.5,469.38 1738.5,291.45 1824.95,205 v7(1870,205) ; v7@1857.27,192.27 ccw(c1826.54,161.54) 1826.54,205 ccw(c1826.54,248.46) v7@1857.27,217.73
  Bottom Layer w9: P20.6@1682.39,97.79 ccw(c1640.6,140) 1700,140 ; P20.6@1688.72,91.39 ccw(c1661.96,118.42) 1700,118.42 ccw(c1738.04,118.42) P20.6@1711.28,91.39 ; P20.6@1700,80 1700,140 ; P20.6@1717.61,97.79 cw(c1759.4,140) 1700,140 ; v7@1857.27,192.27 ccw(c1826.54,161.54) 1826.54,205 ccw(c1826.54,248.46) v7@1857.27,217.73 ; v7(1870,205) 1765,205 1700,140
PA8: P15.8 U3.67 | length 2961
  Top Layer w10: U3.67@1497.29,1262.42 1529.87,1295 1724,1295 v2(1760,1259) ; U3.67@1524.38,1288.22 cw(c1540.74,1271.86) 1540.74,1295 ; v2@1753.19,1259 ccw(c1736.75,1259) 1748.37,1270.63 ccw(c1760,1282.25) v2@1760,1265.81 ; v1@2900,1218 3098,1218 3128,1248 3482.04,1248 3639.04,1405 3735,1405 3810,1480 3810,1550 P15.8@3860,1600 ; v1@2912.07,1212.93 cw(c2924.31,1200.69) 2924.31,1218 ; v1@2912.07,1227.07 ccw(c2933.97,1248.97) 2933.97,1218 ; 3820,1560 ccw(c3777.96,1602.04) P15.8@3836.04,1614.75 ; 3832.93,1572.93 ccw(c3799.18,1606.69) P15.8@3845.81,1616.89 ; 3845.86,1585.86 ccw(c3820.39,1611.33) P15.8@3855.58,1619.03
  Bottom Layer w10: v2@1760,1252.19 cw(c1760,1235.75) 1771.63,1247.37 cw(c1783.25,1259) v2@1766.81,1259 ; v2(1760,1259) 1789,1230 2325,1230 2398,1303 2822,1303 v1(2905,1220) ; v1@2895,1220 ccw(c2870.86,1220) 2887.93,1237.07 ccw(c2905,1254.14) v1@2905,1230
PA9: P18.4 U3.68 | length 778.1
  Top Layer w10: U3.68@1483.37,1276.34 1519.03,1312 1826.42,1312 1883,1368.58 1883,1453 P18.4@1950,1520 P18.4@1937,1520 ; P18.4@1925.47,1520 cw(c1866.26,1520) 1908.13,1478.13 cw(c1950,1436.26) P18.4@1950,1495.47 ; P18.4@1935.47,1520 cw(c1900.4,1520) 1925.2,1495.2 cw(c1950,1470.4) P18.4@1950,1505.47
PA10: P18.3 U3.69 | length 900.5
  Top Layer w10: U3.69@1490.86,1311.66 1508.19,1329 1819,1329 1865,1375 1865,1494 1936,1565 2005,1565 P18.3@2050,1520 ; P18.3@2025.47,1520 ccw(c1966.26,1520) 2008.13,1561.87 ccw(c2050,1603.74) P18.3@2050,1544.53 ; P18.3@2035.47,1520 ccw(c2000.4,1520) 2025.2,1544.8 ccw(c2050,1569.6) P18.3@2050,1534.53
PA11: R1.2 U3.70 | length 177.8
  Top Layer w10: U3.70@1455.53,1304.18 1516.36,1365 R1.2@1557.68,1365 ; R1.2@1550.28,1355.59 ccw(c1527.56,1332.87) 1527.56,1365 ccw(c1527.56,1397.13) R1.2@1550.28,1374.41
PA12: R2.2 R3.2 U3.71 | length 506.4
  Top Layer w10: R3.2@1360.32,1555 1400.32,1555 1490,1465.32 1490,1366.48 U3.71@1441.61,1318.09 ; R3.2@1369.72,1545.59 cw(c1392.44,1522.87) 1392.44,1555 cw(c1392.44,1587.13) R3.2@1369.72,1564.41 ; 1490,1424 1548.68,1424 R2.2@1557.68,1415 ; 1527.52,1424 ccw(c1527.52,1456.18) R2.2@1550.28,1433.43 ; 1527.6,1424 cw(c1527.6,1391.93) R2.2@1550.28,1414.61
PA15: P15.7 U3.77 | length 3365
  Top Layer w10: v4@1249.05,1437.05 ccw(c1237.1,1425.1) 1237.1,1442 ccw(c1237.1,1458.9) v4@1249.05,1446.95 ; U3.77@1252.31,1359.85 1211,1401.16 1211,1422 1231,1442 v4(1254,1442)
  Bottom Layer w8: v4@1248.34,1436.34 cw(c1234.69,1422.69) 1254,1422.69 cw(c1273.31,1422.69) v4@1259.66,1436.34 ; v4(1254,1442) 1254,1246 1287,1213 1523,1213 1597,1287 2003,1287 ; 3701.53,1525.53 3737,1561 3799,1561 P15.7@3860,1500 ; 3809,1551 ccw(c3834.94,1576.93) P15.7@3849.72,1543.36 ; 3817.27,1542.73 ccw(c3839.99,1565.45) P15.7@3852.94,1536.04 ; 3825.54,1534.46 ccw(c3845.05,1553.97) P15.7@3856.16,1528.72 ; 3830.56,1529.44 cw(c3821.13,1520) P15.7@3834.47,1520
  Bottom Layer w10: 2003,1287 2035,1255 2315,1255 2380,1320 3563.89,1320 3701.53,1457.64 3701.53,1525.53
PB0: R32.2 U3.35 U8.1 | length 3260.5
  Top Layer w10: U3.35@1511.21,711.21 1569.42,653 1617,653 1655,615 ; v1@1677,626 cw(c1655,642.5) 1655,615 ; v1(1685,620) 1680,615 1655,615
  Top Layer w15: v1(2439,765) 2525,765 2670,910 2670,1080 2765,1175 3450,1175 3650,1375 v1(3755,1375) ; v1@2444.3,759.7 cw(c2457.11,746.89) 2457.11,765 cw(c2457.11,783.11) v1@2444.3,770.3 ; v1@3749.7,1369.7 ccw(c3736.89,1356.89) 3736.89,1375 ccw(c3736.89,1393.11) v1@3749.7,1380.3
  Bottom Layer w10: v1(1685,620) 2005,620 2070,685 2415,685 2439,709 v1(2439,765) ; v1@1692.07,612.93 cw(c1709.14,595.86) 1709.14,620 cw(c1709.14,644.14) v1@1692.07,627.07 ; v1@2431.93,757.93 cw(c2414.86,740.86) 2439,740.86 cw(c2463.14,740.86) v1@2446.07,757.93
  Bottom Layer w15: v1@3755,1367.5 cw(c3755,1349.39) 3767.8,1362.2 cw(c3780.61,1375) v1@3762.5,1375 ; v1(3755,1375) 3789.68,1340.32 R32.2@3789.68,1240 3789.68,1234.68 3765,1210 U8.1@3765,1162.36 ; U8.1@3760.56,1188.46 ccw(c3749.84,1199.18) 3765,1199.18 ccw(c3780.16,1199.18) U8.1@3769.44,1188.46 ; 3768.17,1213.17 ccw(c3742.33,1239.02) R32.2@3778.88,1239.02 ; R32.2@3778.63,1223.63 cw(c3789.68,1212.57) R32.2@3789.68,1228.21 ; R32.2@3782.04,1248.63 ccw(c3763.59,1267.07) 3789.68,1267.07 ccw(c3815.78,1267.07) R32.2@3797.33,1248.63
PB1: C36.1 R39.1 R40.2 U3.36 | length 2356.7
  Top Layer w12: U3.36@1525.13,725.13 1526.1,725.13 1574.23,677 1638,677 1666.78,648.22 v1(1778.22,648.22) ; v1@1771.85,641.85 ccw(c1756.49,626.49) 1756.49,648.22 ccw(c1756.49,669.94) v1@1771.85,654.58
  Bottom Layer w12: v1(1778.22,648.22) 1988.22,648.22 2146.12,806.12 2438.48,806.12 2475,769.6 2475,435 2544,366 R40.2@2969.68,366 ; v1@1784.58,641.85 cw(c1799.94,626.49) 1799.94,648.22 cw(c1799.94,669.94) v1@1784.58,654.58 ; 2939.93,366 cw(c2939.93,336.23) R40.2@2960.98,357.28 ; 2940.01,366 ccw(c2940.01,395.66) 2960.98,374.69 ccw(c2939.97,395.7) 2969.68,395.7 ccw(c2999.4,395.7) R40.2@2978.39,374.69 ; C36.1@2960.98,304.69 ccw(c2939.97,325.7) 2969.69,325.7 ccw(c2999.4,325.7) C36.1@2978.39,304.69 ; R40.2@2960.98,355.31 cw(c2939.97,334.3) 2969.68,334.3 cw(c2999.4,334.3) R40.2@2978.39,355.31 ; R39.1@2960.98,420.31 cw(c2939.97,399.3) 2969.69,399.3 cw(c2999.4,399.3) R39.1@2978.39,420.31 ; C36.1@2969.68,295 R39.1@2969.69,430
PB3: TFT1.7 U3.89 | length 1303.8
  Top Layer w10: TFT1.7@253.5,890 ccw(c189.54,890) 234.77,935.23 ccw(c280,980.46) TFT1.7@280,916.5 ; TFT1.7@263.5,890 ccw(c223.68,890) 251.84,918.16 ccw(c280,946.32) TFT1.7@280,906.5 ; TFT1.7@280,890 226,944 226,1011 255,1040 310,1040 345,1075 345,1100 496,1251 1027.1,1251 U3.89@1085.27,1192.82
PB4: TFT1.9 U3.90 | length 1534.9
  Top Layer w10: v1@379,1090 ccw(c379,1116.56) 397.78,1097.78 ; v1@379.5,1079.5 534,1234 1016.26,1234 U3.90@1071.36,1178.9 ; v1@389,1080 cw(c410.73,1080) 395.37,1095.37
  Bottom Layer w10: TFT1.9@253.5,690 ccw(c189.54,690) 234.77,735.23 ccw(c280,780.46) TFT1.9@280,716.5 ; TFT1.9@263.5,690 ccw(c223.68,690) 251.84,718.16 ccw(c280,746.32) TFT1.9@280,706.5 ; TFT1.9@280,690 221,749 221,907 253,939 317,939 338,960 338,1039 v1(379,1080) ; v1@369,1080 cw(c344.86,1080) 361.93,1062.93 cw(c379,1045.86) v1@379,1070
PB5: TFT1.6 U3.91 | length 1024.8
  Top Layer w10: TFT1.6@280,990 335,990 ; TFT1.6@292.9,979.72 cw(c314.24,962.71) 314.24,990 cw(c314.24,1017.29) TFT1.6@292.9,1000.28 ; TFT1.6@300.72,973.49 cw(c335,946.17) 335,990 ; TFT1.6@300.72,1006.51 ccw(c335,1033.83) 335,990 ; 1025.85,1194.46 ccw(c1030.99,1199.6) U3.91@1030.99,1192.33 ; U3.91@1057.44,1164.98 1055.33,1164.98 1005.31,1215 560,1215 335,990
PB8: P10.7 U3.95 | length 1491.4
  Top Layer w10: U3.95@1001.76,1109.3 1095,1016.06 1095,965 ; v1(1079.96,949.96) 1095,965 ; v1@1080.89,959.91 ccw(c1082.54,977.46) 1095,965 ; v1@1089.91,950.89 cw(c1107.46,952.54) 1095,965
  Bottom Layer w12: P10.7@960,80 1009,129 1009,291 840,460 840,835 954.96,949.96 v1(1079.96,949.96) ; P10.7@960,103.53 ccw(c960,160.33) 1000.16,120.16 ccw(c1040.33,80) P10.7@983.53,80 ; v1@1073.59,943.59 ccw(c1058.23,928.23) 1058.23,949.96 ccw(c1058.23,971.69) v1@1073.59,956.32
PB9: P10.8 U3.96 | length 1319.5
  Top Layer w12: U3.96@987.84,1095.39 1070,1013.22 1070,995 v1(1055,980)
  Bottom Layer w12: P10.8@943.36,196.64 ccw(c903.2,236.8) 960,236.8 ccw(c1016.8,236.8) P10.8@976.64,196.64 ; P10.8@960,180 960,265 795,430 795,830 945,980 v1(1055,980) ; v1@1048.64,973.64 ccw(c1033.27,958.27) 1033.27,980 ccw(c1033.27,1001.73) v1@1048.64,986.36
PB10: P7.3 U3.47 | length 1672.5
  Top Layer w10: U3.47@1678.24,878.24 1748.48,808 1916.04,808 1996.04,888 2283,888 2760,1365 2865,1365 P7.3@2920,1420 ; P7.3@2895.47,1420 cw(c2836.26,1420) 2878.13,1378.13 cw(c2920,1336.26) P7.3@2920,1395.47 ; P7.3@2905.47,1420 cw(c2870.4,1420) 2895.2,1395.2 cw(c2920,1370.4) P7.3@2920,1405.47
PB11: P13.3 U3.48 | length 1435
  Top Layer w10: U3.48@1692.16,892.16 1759.32,825 1909,825 1989,905 2273.08,905 2547,1178.92 2547,1182 2785,1420 ; P13.3@2796.94,1411.63 ccw(c2785,1407.29) 2785,1420 ; P13.3@2796.94,1428.37 cw(c2785,1432.71) 2785,1420 ; P13.3@2820,1420 2785,1420
PB12: U2.1 U3.51 | length 945.2
  Top Layer w10: U3.51@1720,1039.71 1796.71,1039.71 v1(1814,1057) ; v1@1804,1057 cw(c1779.86,1057) 1796.93,1039.93 cw(c1814,1022.86) v1@1814,1047
  Bottom Layer w10: v1(1814,1057) 1834,1077 2077,1077 2264,890 U2.1@2445,890 ; v1@1814,1067 ccw(c1814,1091.14) 1831.07,1074.07 ccw(c1848.14,1057) v1@1824,1057 ; 2409.95,890 cw(c2409.95,872.88) U2.1@2422.05,884.99 ; 2410.25,890 ccw(c2410.25,906.68) U2.1@2422.05,894.89 ; U2.1@2455,889.94 U2.1@2479.94,889.94
PB13: U2.6 U3.52 | length 1217.5
  Top Layer w10: U3.52@1706.08,1053.63 1737.45,1085 1838.18,1085 1874,1120.82 v1@1874,1121 ; U3.52@1733.17,1079.43 cw(c1746.61,1065.99) 1746.61,1085 ; 1856.54,1103.35 cw(c1875,1084.89) v1@1875,1111 ; 1858.51,1105.32 ccw(c1842.83,1121) v1@1865,1121
  Bottom Layer w10: v1(1875,1121) 2090,1121 2125,1086 2554,1086 2650,990 2724.94,990 U2.6@2725,989.94 ; v1@1882.07,1113.93 cw(c1899.14,1096.86) 1899.14,1121 cw(c1899.14,1145.14) v1@1882.07,1128.07 ; 2679.95,990 cw(c2679.95,972.88) U2.6@2692.05,984.99 ; 2680.25,990 ccw(c2680.25,1006.68) U2.6@2692.05,994.89
PB14: U2.2 U3.53 | length 956.9
  Top Layer w10: U3.53@1692.16,1067.55 1739.04,1114.42 v1@1815,1114.42 ; 1789.47,1114.42 ccw(c1789.47,1140.53) v1@1807.93,1122.07 ; 1792.25,1114.42 cw(c1792.25,1092.25) v1@1807.93,1107.93
  Bottom Layer w10: v1@1815,1105 cw(c1815,1082.25) 1831.09,1098.34 ; v1@1815,1114.42 1835.42,1094 2084.04,1094 2238.04,940 U2.2@2455,940 ; v1@1825,1115 ccw(c1850.53,1115) 1832.48,1096.95 ; U2.2@2422.05,935.05 ccw(c2410.1,923.1) 2410.1,940 ccw(c2410.1,956.9) U2.2@2422.05,944.95
  other v1: 1815,1115
PB15: U2.5 U3.54 | length 1259.1
  Top Layer w10: U3.54@1678.24,1081.47 1740,1143.22 v1(1776.21,1143.22) ; v1@1769.14,1136.15 ccw(c1752.07,1119.08) 1752.07,1143.22 ccw(c1752.07,1167.37) v1@1769.14,1150.29
  Bottom Layer w10: v1@1783.28,1136.15 cw(c1823.95,1095.48) 1823.95,1153 ; 1799.81,1153 ccw(c1799.81,1119.62) v1(1776.21,1143.22) 1785.99,1153 2088,1153 2138,1103 2572,1103 2635.06,1039.94 U2.5@2725,1039.94 ; U2.5@2692.05,1034.99 ccw(c2680.1,1023.04) 2680.1,1039.94 ccw(c2680.1,1056.84) U2.5@2692.05,1044.89
PC0: P10.1 U3.15 | length 1127.2
  Top Layer w10: P10.1@635.47,80 ccw(c576.26,80) 618.13,121.87 ccw(c660,163.74) P10.1@660,104.53 ; P10.1@645.47,80 ccw(c610.4,80) 635.2,104.8 ccw(c660,129.6) P10.1@660,94.53 ; P10.1@660,80 600,140 600,195 655,250 810,250 1042,482 1042,640.1 U3.15@1127.03,725.13
PC1: P10.2 U3.16 | length 952
  Top Layer w10: P10.2@660,180 713,233 817.04,233 1060,475.96 1060,630.26 U3.16@1140.95,711.21 U3.16@1140.95,708.69 ; P10.2@660,194.53 ccw(c660,229.6) 684.8,204.8 ccw(c709.6,180) P10.2@674.53,180 ; P10.2@660,204.53 ccw(c660,263.74) 701.87,221.87 ccw(c743.74,180) P10.2@684.53,180
  Bottom Layer w12: P10.2@660,180 P10.2@660,190
PC2: P10.3 U3.17 | length 939
  Top Layer w10: P10.3@760,80 810,130 810,200 1077,467 1077,619.42 U3.17@1154.87,697.29 ; P10.3@760,94.53 ccw(c760,129.6) 784.8,104.8 ccw(c809.6,80) P10.3@774.53,80 ; P10.3@760,104.53 ccw(c760,163.74) 801.87,121.87 ccw(c843.74,80) P10.3@784.53,80
  Bottom Layer w10: P10.3@760,80 P10.3@760,90
PC3: P10.4 U3.18 | length 1228.2
  Top Layer w10: 712.5,137.5 cw(c756.1,93.9) P10.4@758.89,155.5 ; 721.66,146.66 ccw(c688.33,180) P10.4@735.47,180 ; 728.54,153.54 cw(c757.49,124.58) P10.4@759.34,165.49 ; P10.4@757.5,182.5 715,140 715,60 750,25 890,25 910,45 910,255 1094,439 1094,608.58 U3.18@1168.79,683.37 U3.18@1168.79,680.85
PC4: P10.5 U3.33 | length 2290.2
  Top Layer w10: U3.33@1483.37,683.37 1566.74,600 1632.77,600 1672.77,560 v1(1810,560) ; v1@1802.93,552.93 ccw(c1785.86,535.86) 1785.86,560 ccw(c1785.86,584.14) v1@1802.93,567.07
  Bottom Layer w9: P10.5@857.5,77.5 912.53,22.47 1627.47,22.47 1650,45 ; P10.5@860,54.97 cw(c860,6.62) 894.19,40.81 ; P10.5@860,63.97 cw(c860,37.35) 878.83,56.17 ; P10.5@876.03,80 ccw(c926.79,80) 890.9,44.1 ; P10.5@885.03,80 ccw(c957.52,80) 906.26,28.74
  Bottom Layer w10: 1650,45 1650,120 1775,245 1910,245 ; v1(1810,560) 1870,560 1985,445 1985,310 1920,245 1900,245 ; v1@1817.07,552.93 cw(c1834.14,535.86) 1834.14,560 cw(c1834.14,584.14) v1@1817.07,567.07
PC5: P10.6 U3.34 | length 2240.5
  Top Layer w10: U3.34@1497.29,697.29 1569.58,625 v5(1590,625) ; v5@1584.7,619.7 ccw(c1571.89,606.89) 1571.89,625 ccw(c1571.89,643.11) v5@1584.7,630.3
  Bottom Layer w9: 910,65 936.53,38.47 1523.47,38.47 1550,65
  Bottom Layer w10: P10.6@860,155.47 cw(c860,96.26) 901.87,138.13 cw(c943.74,180) P10.6@884.53,180 ; P10.6@860,165.47 cw(c860,130.4) 884.8,155.2 cw(c909.6,180) P10.6@874.53,180 ; P10.6@860,180 910,130 910,65 ; 1550,65 1550,100 1715,265 1915,265 1967.97,317.97 1967.97,432.03 1875,525 1690,525 v5(1590,625) ; v5@1590,617.5 cw(c1590,599.39) 1602.8,612.2 cw(c1615.61,625) v5@1597.5,625
PC6: P20.4 U3.63 | length 2166.9
  Top Layer w10: v1@1523,1031 ccw(c1498.86,1031) 1515.93,1048.07 ccw(c1533,1065.14) v1@1533,1041 ; v1(1533,1031) 1509,1055 1509,1162.77 U3.63@1552.97,1206.74
  Bottom Layer w8: P20.4@1474.47,80 ccw(c1412.84,80) 1456.42,123.58 ccw(c1500,167.16) P20.4@1500,105.53 ; P20.4@1482.47,80 ccw(c1440.16,80) 1470.08,109.92 ccw(c1500,139.84) P20.4@1500,97.53 ; P20.4@1500,80 1379,201 1230,201 1114,317 1114,507.77 1129.23,523 1151,523 1184,490 1345,490 1391,536 1391,741 1303,829 1303,944.87 1328.13,970 1503,970 1533,1000 v1(1533,1031) ; v1@1525.22,1023.22 cw(c1506.44,1004.44) 1533,1004.44 cw(c1559.56,1004.44) v1@1540.78,1023.22
PC7: P20.3 U3.64 | length 2144.5
  Top Layer w10: v1@1482.93,1005.07 ccw(c1465.86,1022.14) 1490,1022.14 ccw(c1514.14,1022.14) v1@1497.07,1005.07 ; v1(1490,998) 1490,1171.61 U3.64@1539.05,1220.66
  Bottom Layer w8: P20.3@1374.47,80 ccw(c1312.84,80) 1356.42,123.58 ccw(c1400,167.16) P20.3@1400,105.53 ; P20.3@1382.47,80 ccw(c1340.16,80) 1370.08,109.92 ccw(c1400,139.84) P20.3@1400,97.53 ; P20.3@1400,80 1295,185 1216,185 1094,307 1094,508.98 1127.02,542 1162.72,542 1197.72,507 1334,507 1371,544 1371,739.4 1286.41,824 1286.41,949.48 1322.92,986 1478,986 ; 1434.47,986 ccw(c1434.47,1053.53) v1@1482.22,1005.78 ; 1453.79,986 ccw(c1453.79,1034.21) v1@1487.88,1000.12 ; 1473.1,986 ccw(c1473.1,1014.9) v1@1493.54,994.46
  Bottom Layer w10: 1478,986 v1(1490,998)